# Altium PCB Mach_in.PcbDoc
Units mm, origin at the board's own origin, x right, y up, seen from the top; angles counter-clockwise.
Board outline 152.4 x 101.6 mm, 2 copper layers (Top Layer, Bottom Layer); 37 components, 33 nets, 148 pads, 0 vias.
Unrouted connection lines stored in the file: 91.
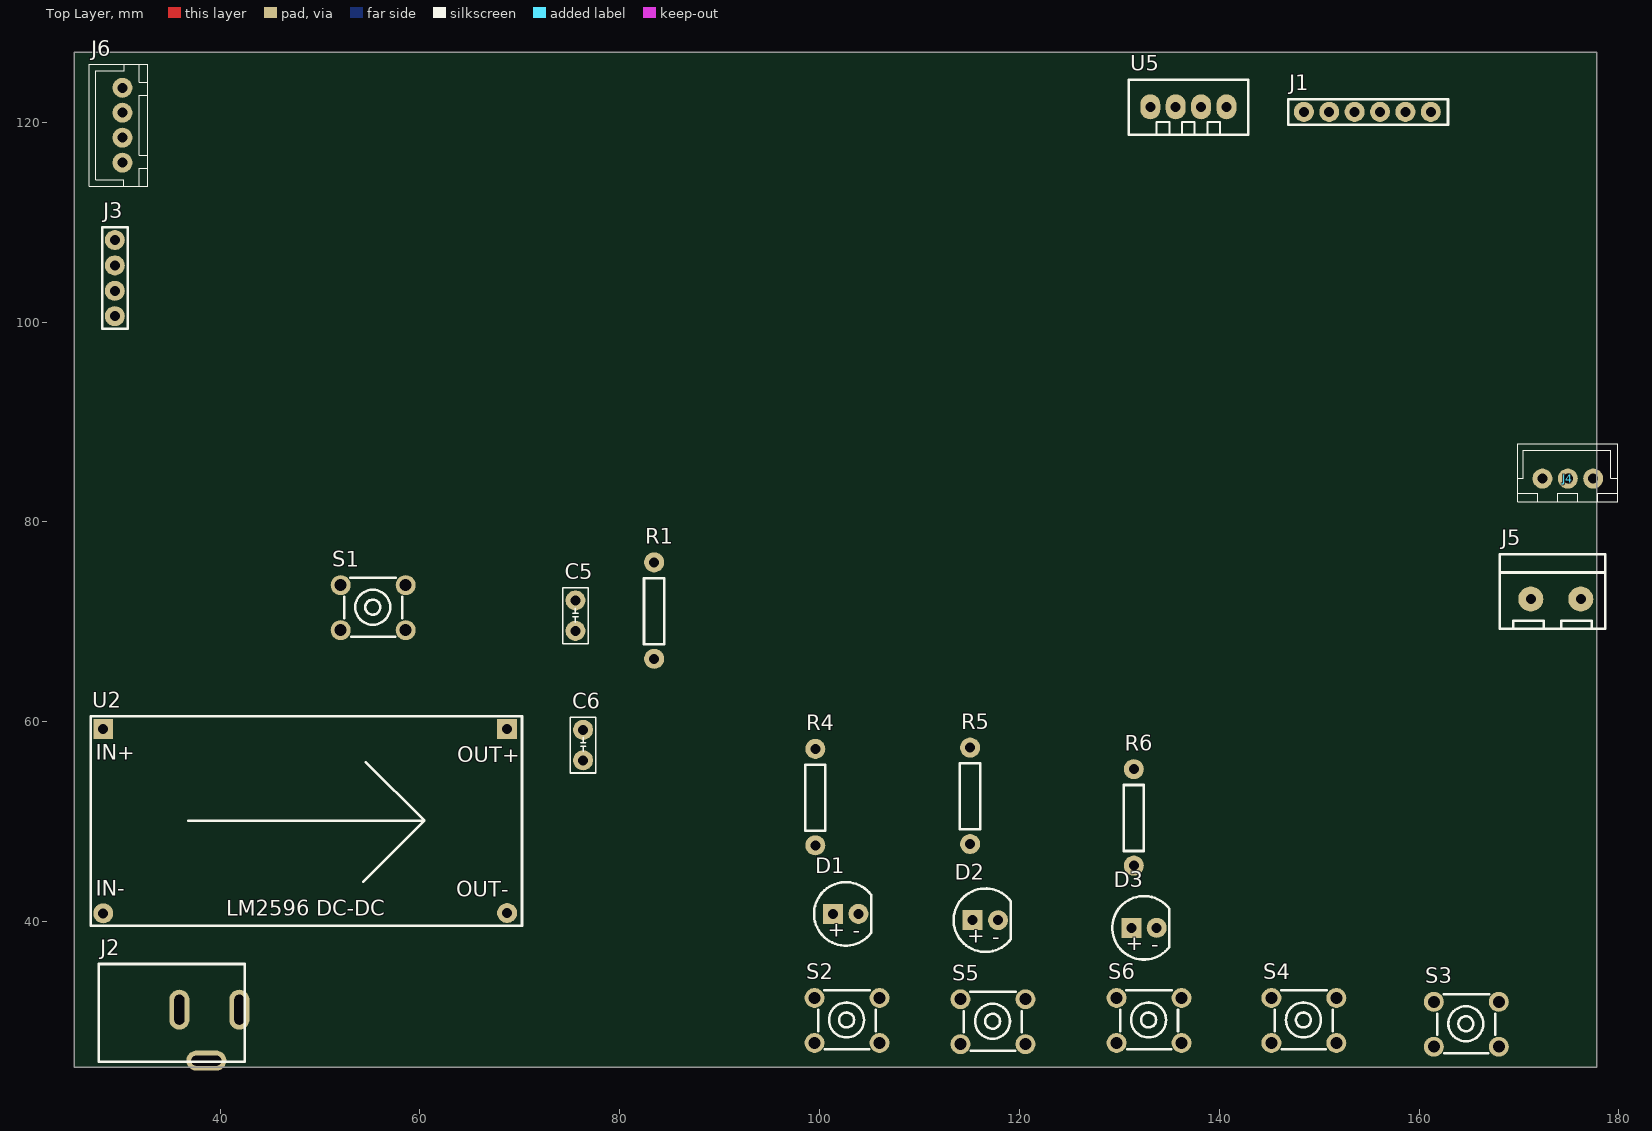
[diagram p0: Top Layer view]
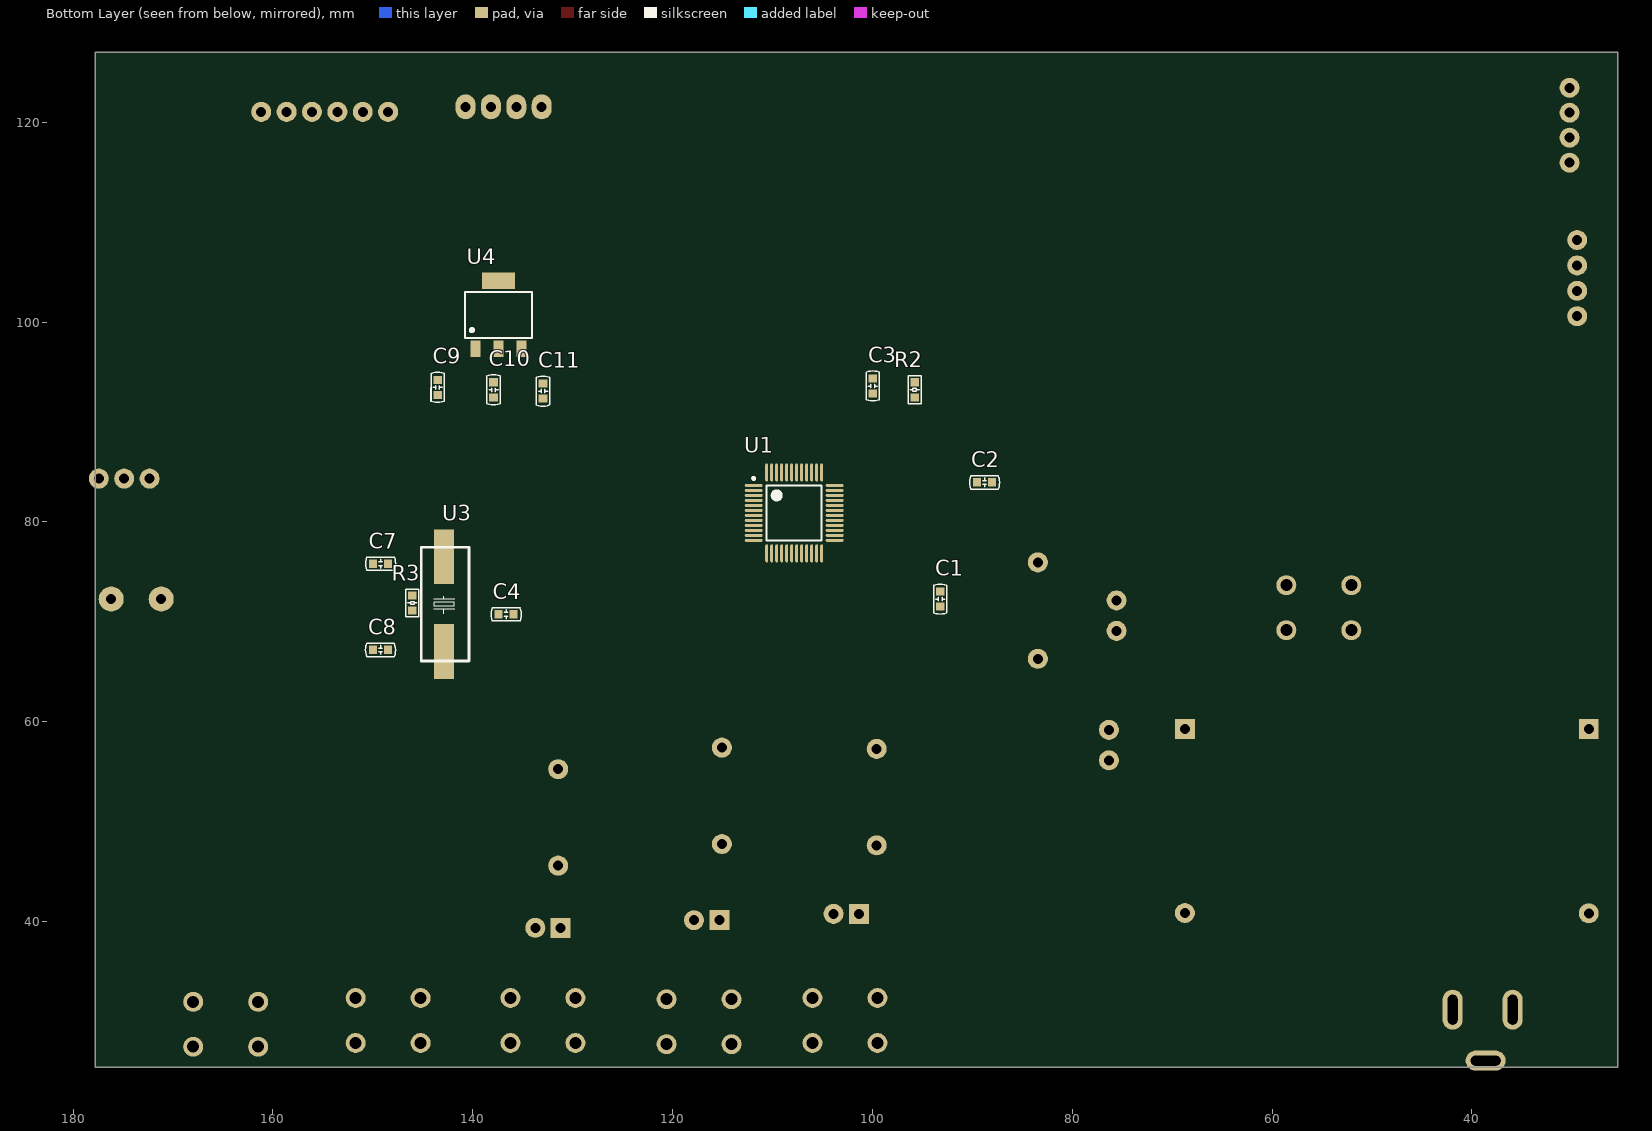
[diagram p1: Bottom Layer view, seen from below]

## Layer stack, top to bottom
Top Solder: solder mask 0.0102, Solder Resist, Dk 3.5
Top Layer: signal copper 0.0356
Dielectric 1: dielectric 0.32, FR-4, Dk 4.8
Bottom Layer: signal copper 0.0356
Bottom Solder: solder mask 0.0102, Solder Resist, Dk 3.5

## Board outline
25.4,25.4 177.8,25.4 177.8,127 25.4,127

## Design rules (kind name [scope] priority, off if disabled: settings)
Clearance [All] p1: gap=0.15 ignorepadtopadclearanceinfootprint=FALSE
PolygonConnect [All] p1: connectstyle=Relief reliefconductorwidth=0.254 reliefentries=4 polygonreliefangle="90 Angle" airgapwidth=0.254
RoutingLayers [All] p1: top layer_v5=FALSE bottom layer_v5=TRUE
RoutingVias [All] p1: holewidth=0.711 width=1.27 viastyle="Through Hole" minholewidth=0.711 minwidth=1.27 maxholewidth=0.711 maxwidth=1.27
SolderMaskExpansion [All] p1: expansion=0.102 istentingtop=FALSE
SupplyNets "Schematic Supply Nets_3" [InNet('+5')] p1: voltage=0.000
SupplyNets "Schematic Supply Nets_2" [InNet('+12')] p2: voltage=0.000
SupplyNets "Schematic Supply Nets_1" [InNet('GND')] p3: voltage=0.000
SupplyNets "Schematic Supply Nets" [InNet('3.3V')] p4: voltage=0.000
Width GND [InNet('GND')] p1: maxlimit=0.25 minlimit=0.25 preferedwidth=0.25
Width 12V [InNet('+12')] p2: maxlimit=1 minlimit=1 preferedwidth=1
Width 5V [InNet('+5')] p3: maxlimit=0.8 minlimit=0.8 preferedwidth=0.8
Width 3.3V [InNet('3.3V')] p4: maxlimit=0.25 minlimit=0.25 preferedwidth=0.25
Width NET [All] p5: maxlimit=0.25 minlimit=0.25 preferedwidth=0.25
29 further rules are at their usual default settings.

## Components (designator, comment, footprint, x,y, rotation, side; value= is the part's Value field where it differs from the comment)
C1 "CAPACITOR 0603" "CAPACITOR 0603" 93.218,72.272 r90 bottom
C2 "CAPACITOR 0603" "CAPACITOR 0603" 88.773,83.947 r180 bottom
C3 "CAPACITOR 0603" "CAPACITOR 0603" 99.949,93.599 r270 bottom
C4 "CAPACITOR 0603" "CAPACITOR 0603" 136.652,70.739 r0 bottom
C5 "CAPCITOR 104" "CAPACITOR 104" 75.565,70.612 r0 top
C6 "CAPCITOR 104" "CAPACITOR 104" 76.327,57.658 r0 top
C7 "CAPACITOR 0603" "CAPACITOR 0603" 149.216,75.819 r180 bottom
C8 "CAPACITOR 0603" "CAPACITOR 0603" 149.225,67.183 r180 bottom
C9 "CAPACITOR 0603" "CAPACITOR 0603" 143.51,93.463 r270 bottom
C10 "CAPACITOR 0603" "CAPACITOR 0603" 137.922,93.218 r90 bottom
C11 "CAPACITOR 0603" "CAPACITOR 0603" 132.969,93.082 r90 bottom
D1 "LED_5mm_GREEN" LED_5mm_GREEN 102.616,40.767 r0 top
D2 "LED_5mm_YELLOW" LED_5mm_YELLOW 116.586,40.132 r0 top
D3 "LED_5mm_RED" LED_5mm_RED 132.461,39.37 r0 top
J1 "HM-10" FEMALE-2.54-6P 154.813,121.031 r90 top
J2 "JACK_P4" JACK_P4 35.179,30.861 r180 top
J3 "SWD" MALE-2.54-4P 29.464,104.394 r0 top
J4 "L298N_A" JST-2.54-3P 174.879,84.901 r270 top
J5 "L298N_B" BORNE-5.00-2P 173.355,73.025 r270 top
J6 "LCD16x2 I2C" JST-2.54-4P 29.841,119.684 r0 top
R1 "RESISTOR_9.5mm" RESISTOR_PTH_9.5mm 83.439,71.12 r90 top
R2 "RESISTOR_0603" RESISTOR_0603 95.758,93.218 r270 bottom
R3 "RESISTOR_0603" RESISTOR_0603 146.05,71.882 r90 bottom
R4 "RESISTOR_9.5mm" RESISTOR_PTH_9.5mm 99.568,52.451 r90 top
R5 "RESISTOR_9.5mm" RESISTOR_PTH_9.5mm 115.062,52.578 r90 top
R6 "RESISTOR_9.5mm" RESISTOR_PTH_9.5mm 131.445,50.419 r90 top
S1 "PUSH_BUTTON_6X6" PUSH_BUTTON_6X6 55.32,71.41 r0 top
S2 "PUSH_BUTTON_6X6" PUSH_BUTTON_6X6 102.743,30.099 r0 top
S3 "PUSH_BUTTON_6X6" PUSH_BUTTON_6X6 164.719,29.718 r0 top
S4 "PUSH_BUTTON_6X6" PUSH_BUTTON_6X6 148.463,30.099 r0 top
S5 "PUSH_BUTTON_6X6" PUSH_BUTTON_6X6 117.348,29.972 r0 top
S6 "PUSH_BUTTON_6X6" PUSH_BUTTON_6X6 132.969,30.099 r0 top
U1 "STM32F103C8T6" STM-LQFP48_N 107.823,80.899 r180 bottom
U2 "MODULE_LM2596" MODULE_LM2596 48.514,50.038 r0 top
U3 "CRISTAL_16Mhz" CRISTAL_16Mhz_SMD 142.875,71.755 r90 bottom
U4 "AMS1117" AMS1117 137.414,100.711 r90 bottom
U5 "DHT11" DHT11 136.906,121.539 r270 top

## Footprints (in the part's own frame and the unit in brackets; to place one, negate y for a bottom-side part, rotate by r counter-clockwise, add the part's x,y. Pads: shape width x height; smd on the part's side, far side on the other; paste and mask are expansions set on the pad)
AMS1117 [mm] "SOT-223"
  rect 1.65x1 smd: 1(-3.4,2.29) 2(-3.4,0) 3(-3.4,-2.29)
  rect 1.65x3.3 smd: 2(3.4,0)
  silkscreen extent -2.3,-3.35 2.3,3.35, body extent -3.6,-3.25 3.4,3.25, height 1.87
BORNE-5.00-2P [mm]
  round 2.5 hole 1: 1(0.754,2.821) 2(0.754,-2.18)
  silkscreen extent -3.75,-5.27 3.75,5.27, body extent -3.86,-5.28 3.74,5.32, height 10.1
"CAPACITOR 104" [mm]
  round 2 hole 1: 1(0,-1.524) 2(0,1.524)
  silkscreen extent -1.27,-2.79 1.27,2.79, body extent -1.02,-2.5 1.02,2.5, height 5.5
"CAPACITOR 0603" [mm]
  rect 0.806x0.864 smd: 1(-0.753,0) 2(0.753,0)
  silkscreen extent -1.5,-0.66 1.5,0.66, body extent -0.79,-0.4 0.81,0.4, height 0.81
CRISTAL_16Mhz_SMD [mm]
  rect 5.5x2 smd: 1(-4.75,0) 2(4.75,0)
  silkscreen extent -5.68,-2.5 5.72,2.3, body extent -6.61,-2.52 6.59,2.28, height 4.3
DHT11 [mm] "SENSOR HUMIDITY/TEMPERATURE"
  oval 2.5x2 hole 1: 1(0,-3.81) 2(0,-1.27) 3(0,1.27) 4(0,3.81)
  silkscreen extent -2.71,-5.97 2.79,5.97, body extent -2.71,-6 2.79,6, height 15.5
FEMALE-2.54-6P [mm]
  round 2 hole 1: 1(0,-6.35) 2(0,-3.81) 3(0,-1.27) 4(0,1.27) 5(0,3.81) 6(0,6.35)
  silkscreen extent -1.27,-8.08 1.27,7.93, body extent -1.19,-8.13 1.21,7.97, height 8.3
JACK_P4 [mm]
  oval 2x4 hole 1 slot 3 at 90 deg: 1(-6.746,-0.318) 2(-0.747,-0.318)
  oval 4x2 hole 1 slot 3 at 0 deg: 3(-3.447,4.783)
  silkscreen extent -7.3,-4.89 7.3,4.89, body extent -7.27,-4.92 7.23,4.88, height 11.38
JST-2.54-3P [mm]
  round 2 hole 1: 1(0.573,2.54) 2(0.573,0) 3(0.573,-2.54)
  silkscreen extent -2.9,-5 2.9,5, body extent -2.85,-4.95 2.9,4.95, height 7.02
JST-2.54-4P [mm]
  round 2 hole 1: 1(0.385,3.76) 2(0.385,1.26) 3(0.385,-1.24) 4(0.385,-3.74)
  silkscreen extent -2.92,-6.1 2.92,6.1, body extent -2.92,-6.09 2.92,6.09, height 7.21
LED_5mm_GREEN [mm]
  rect 2x2 hole 1: 1(-1.27,0)
  round 2 hole 1: 2(1.27,0)
  silkscreen extent -3.17,-3.17 2.54,3.17, body extent -2.97,-2.83 2.48,3.07, height 8.65
LED_5mm_RED [mm]
  rect 2x2 hole 1: 1(-1.27,0)
  round 2 hole 1: 2(1.27,0)
  silkscreen extent -3.17,-3.17 2.54,3.17, body extent -2.94,-2.9 2.45,2.9, height 8.72
LED_5mm_YELLOW [mm]
  rect 2x2 hole 1: 1(-1.27,0)
  round 2 hole 1: 2(1.27,0)
  silkscreen extent -3.17,-3.17 2.54,3.17, body extent -2.97,-2.96 2.48,2.94, height 8.65
MALE-2.54-4P [mm]
  round 2 hole 1: 1(0,-3.81) 2(0,-1.27) 3(0,1.27) 4(0,3.81)
  silkscreen extent -1.27,-5.08 1.27,5.07, body extent -1.21,-5.09 1.19,5.07, height 8.36
MODULE_LM2596 [mm] "MODULE BUCK STEP DOWN 3A 43x20mm"
  round 2 hole 1: 1(20.21,-9.185) 4(-20.21,-9.215)
  rect 2x2 hole 1: 2(20.21,9.215) 3(-20.21,9.215)
  silkscreen extent -21.45,-10.47 21.7,10.49, body extent -21.49,-10.49 21.71,10.61, height 13.15
PUSH_BUTTON_6X6 [mm]
  round 2 hole 1.2: 1(-3.25,-2.25) 1(3.25,-2.25) 2(-3.25,2.25) 2(3.25,2.25)
  silkscreen extent -2.9,-2.9 2.9,3, body extent -3.94,-3.07 4.07,2.93, height 6.8
RESISTOR_0603 [mm]
  rect 0.806x0.864 smd: 1(-0.753,0) 2(0.753,0)
  silkscreen extent -1.39,-0.66 1.38,0.66, body extent -0.79,-0.4 0.81,0.4, height 0.47
RESISTOR_PTH_9.5mm [mm]
  round 2 hole 1: 1(-4.826,0) 2(4.826,0)
  silkscreen extent -3.36,-1.02 3.24,1.02, body extent -5,-1.11 5,1.11, height 2.61
STM-LQFP48_N [mm] "QFP, 48-Leads, Body 7x7mm, Pitch 0.5mm, IPC Medium Density"
  oval 1.8x0.3 smd: 1(-4.05,2.75) 2(-4.05,2.25) 3(-4.05,1.75) 4(-4.05,1.25) 5(-4.05,0.75) 6(-4.05,0.25) 7(-4.05,-0.25) 8(-4.05,-0.75) 9(-4.05,-1.25) 10(-4.05,-1.75) 11(-4.05,-2.25) 12(-4.05,-2.75) 25(4.05,-2.75) 26(4.05,-2.25) 27(4.05,-1.75) 28(4.05,-1.25) 29(4.05,-0.75) 30(4.05,-0.25) 31(4.05,0.25) 32(4.05,0.75) 33(4.05,1.25) 34(4.05,1.75) 35(4.05,2.25) 36(4.05,2.75)
  oval 0.3x1.8 smd: 13(-2.75,-4.05) 14(-2.25,-4.05) 15(-1.75,-4.05) 16(-1.25,-4.05) 17(-0.75,-4.05) 18(-0.25,-4.05) 19(0.25,-4.05) 20(0.75,-4.05) 21(1.25,-4.05) 22(1.75,-4.05) 23(2.25,-4.05) 24(2.75,-4.05) 37(2.75,4.05) 38(2.25,4.05) 39(1.75,4.05) 40(1.25,4.05) 41(0.75,4.05) 42(0.25,4.05) 43(-0.25,4.05) 44(-0.75,4.05) 45(-1.25,4.05) 46(-1.75,4.05) 47(-2.25,4.05) 48(-2.75,4.05)
  silkscreen extent -4.18,-2.75 2.75,3.57, body extent -3.5,-3.5 3.5,3.5, height 1.6

## Part data
C1 C2 C3 C4 C7 C8 C9 C10 C11: "Generic Capacitor 0603, 1.6x0.8x0.9mm."
C5 C6: library part "CAPACITOR 104", "Ceramic Capacitor 104, 3mm."
D1: "LED PTH 5mm Green."
D2: "LED PTH 5mm Yellow."
D3: "LED PTH 5mm Red."
J1: library part FEMALE-2.54-6P, "Female Header Connector 2.54mm 6 Pins.", JLCPCB PN=C5224026
J2: "9V Battery Connector Jack P4."
J3: library part MALE-2.54-4P, "Male Header Connector 2.54mm 4 Pins.", JLCPCB PN=C492403
J4: library part JST-2.54-3P, "Female Connector JST 3 Vias, 2.54mm."
J5: library part BORNE-5.00-2P, "Borne 2 Vias, Pitch 5mm.", JLCPCB PN=C91153
J6: library part JST-2.54-4P, "Female Connector JST 4 Vias, 2.54mm."
R1 R4 R5 R6: "Generic Resistor 9.5mm."
R2 R3: "Generic Resistor 0603."
S1 S2 S3 S4 S5 S6: "Push Button Tactile Switch PTH 4 Pins 6x6mm.", JLCPCB PN=C255811
U1: "ARM Cortex-M3 32-bit MCU, 64 KB Flash, 20 KB Internal RAM, 37 I/Os, 48-pin LQFP, -40 to 85 degC, Tray", I/Os (High Current)=37, Operating Frequency(F) (Processor speed) (MHz)=72, Supplier Part Number 1=497-6063-ND, Supply Voltage(Vcc) min (V)=2, A/D Converter="2x12-bit (10 Channel)", ComponentLink1Description="Manufacturer URL", ComponentLink1URL=http://www.st.com/web/en/home.html, ComponentLink2Description=Datasheet, ComponentLink2URL=http://www.st.com/st-web-ui/static/active/en/resource/technical/document/datasheet/CD00161566.pdf, ComponentLink3Description="Package Specification", ComponentLink3URL=http://www.st.com/st-web-ui/static/active/en/resource/technical/document/datasheet/DM00058181.pdf, Core="ARM Cortex-M3", DatasheetVersion="Rev. 16", FLASH Size (Prog) (kB)=64, Internal RAM Size (kB)=20, Mounting Technology="Surface Mount", PackageDescription="48-Pin Low Profile Quad Flat Package, 7 x 7 mm Body, 0.5 mm Pitch", PackageReference=LQFP48, PackageVersion="Rev. 6, 06/2013", Packing=Tray, PartNumber=STM32F103C8T6, Supplier 1=Digi-Key, Supplier 2=Farnell, Supplier 3=Newark, Supplier 4=Newark, Supplier 5=Mouser, Supplier Part Number 2=1447637, Supplier Part Number 3=59M2182, Supplier Part Number 4=57P1222, Supplier Part Number 5=511-STM32F103C8T6
U2: "MODULE BUCK STEP DOWN 3A 43x20mm", ComponentLink1Description=Datasheet, ComponentLink1URL=https://www.ti.com/lit/ds/symlink/lm2596.pdf
U3: "CRYSTAL 16MHZ, PTH and SMD", Digikey PN=3155-16M20P2/49US-ND, Mouser PN=449-LFXTAL022786BULK
U4: "IC REG LINEAR 1A SOT-89-3L", JLCPCB PN=C963410, ComponentLink1Description=Datasheet, ComponentLink1URL=http://www.advanced-monolithic.com/pdf/ds1117.pdf, Digikey PN=4518-AMS1117-3.3CT-ND
U5: "SENSOR HUMIDITY/TEMPERATURE", Digikey PN=1528-1228-ND

## Nets (pads, with @x,y where several pads share a name; then routed paths per layer and width w, separated by ;. In a path a pad name is that pad's centre, name@x,y a point inside that pad or via, vN(x,y) a via of type N, cw(c..) or ccw(c..) an arc to the next point about the centre after c; other vN are vias at no path point)
3.3V: C1.1 C2.1 C3.1 C4.1 C10.2 C11.2 J1.2 J3.1 R1.2 U1.1 U4.2 U5.1
+5: C6.2 C9.2 J6.1 U2.2 U4.3
+12: J5.1 U2.3
Boot0: R2.2 U1.44
"Button 1": S2.2 U1.10
"Button 2": S3.2 U1.11
"Button 3": S4.2 U1.12
"Button 4": S5.2 U1.13
"Button 5": S6.2 U1.14
CD1: R4.1 U1.18
CD2: R5.1 U1.19
CD3: R6.1 U1.21
DATA_DHT11: U1.22 U5.2
ENA: J4.1
GND: C5.1 C6.1 C7.1 C8.1 C9.1 C10.1 C11.1 D1.2 D2.2 D3.2 J1.3 J2.2 J2.3 J3.4 J5.2 J6.2 R2.1 S1.1 S2.1 S3.1 S4.1 S5.1 S6.1 U1.8 U1.23 U1.35 U1.47 U2.1 U2.4 U4.1 U5.4
IN1: J4.2 U1.32
IN2: J4.3 U1.33
NetC1_2: C1.2 U1.24
NetC2_2: C2.2 U1.36
NetC3_2: C3.2 U1.48
NetC4_2: C4.2 U1.9
NetD1_1: D1.1 R4.2
NetD2_1: D2.1 R5.2
NetD3_1: D3.1 R6.2
OSC_IN: C7.2 R3.2 U1.5 U3.2
OSC_OUT: C8.2 R3.1 U1.6 U3.1
Reset: C5.2 R1.1 S1.2 U1.7
RX_HM10: J1.5 U1.30
SCL_LCD: J6.4
SDA_LCD: J6.3
SWCLK: J3.3 U1.37
SWDIO: J3.2 U1.34
TX_HM10: J1.4 U1.31
pads on no net: J1.1 J1.6 J2.1 U1.2 U1.3 U1.4 U1.15 U1.16 U1.17 U1.20 U1.25 U1.26 U1.27 U1.28 U1.29 U1.38 U1.39 U1.40 U1.41 U1.42 U1.43 U1.45 U1.46 U5.3

## Text inside footprints (layer, text, board x,y; h text height)
D1: Top Overlay "+" at 100.789,38.501 h1.52; Top Overlay "-" at 103.329,38.374 h1.52
D2: Top Overlay "-" at 117.299,37.739 h1.52; Top Overlay "+" at 114.759,37.866 h1.52
D3: Top Overlay "+" at 130.634,37.104 h1.52; Top Overlay "-" at 133.174,36.977 h1.52
U2: Top Overlay "LM2596 DC-DC" at 40.623,40.569 h1.52; Top Overlay "OUT+" at 63.737,55.936 h1.52; Top Overlay "IN-" at 27.542,42.601 h1.52; Top Overlay "IN+" at 27.542,56.19 h1.52; Top Overlay "OUT-" at 63.61,42.474 h1.52